# EAGLE board 3PDT (EAGLE 7.6.0)
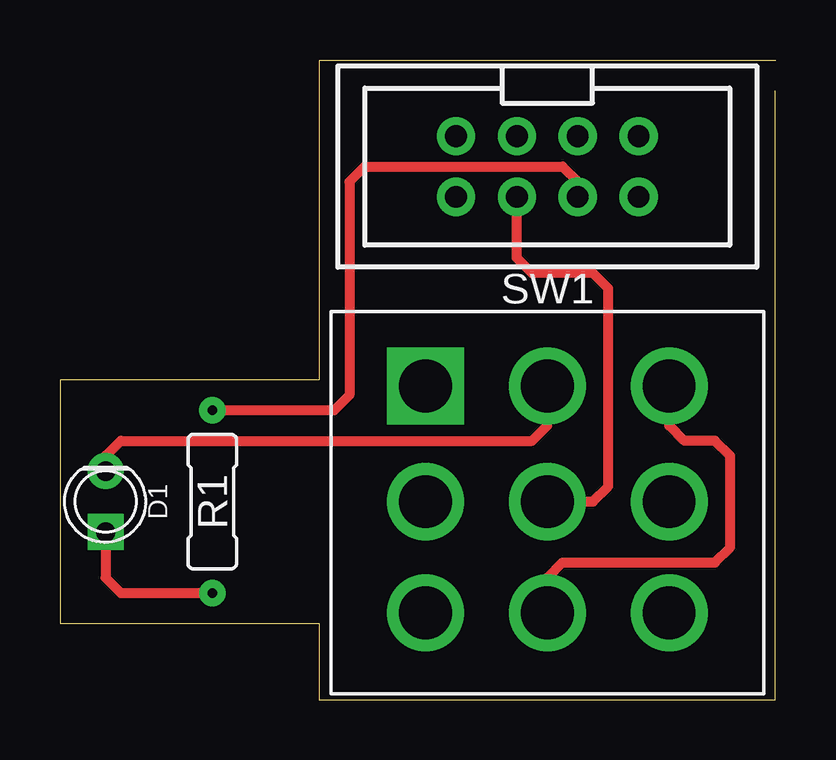
[diagram p0: board, top side]
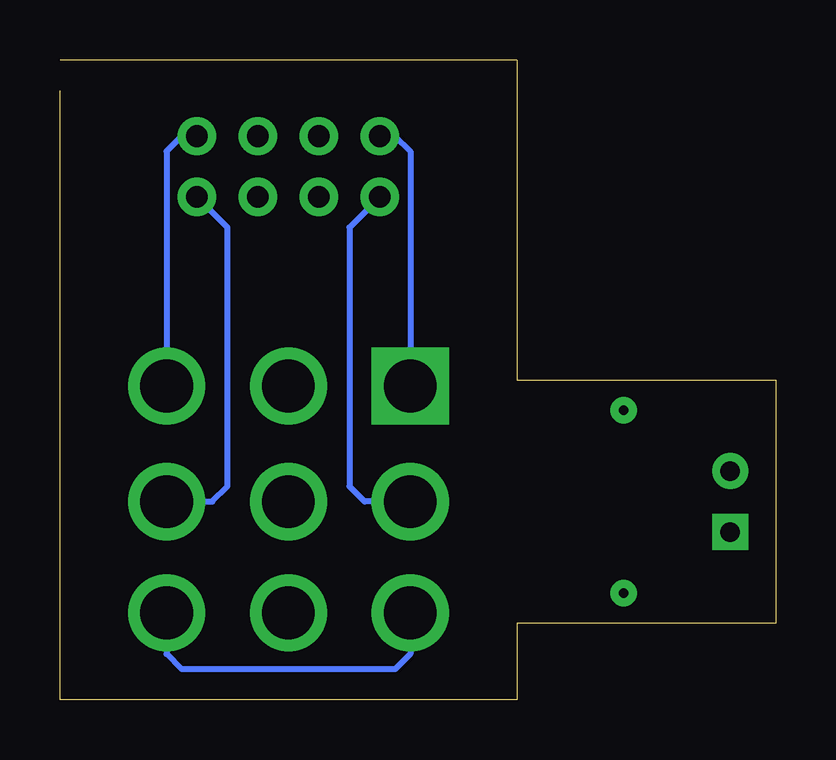
[diagram p1: board, bottom side, seen from below]

Size 29.84 x 26.67 mm. Coordinates in mm from the lower left corner, seen from the top.
Outline: 29.82,25.39 29.82,0 10.79,0 10.79,3.17 0,3.17 0,13.34 10.79,13.34 10.79,26.67 29.84,26.67
Copper layers (1*16): Top 0.035mm / dielectric 1.6mm / Bottom 0.035mm
Design rules "Elecrow_2-layer_PCB_eagle_rule": minimum track width 6mil, minimum drill 12mil, track to track 6mil, track to pad 6mil, pad to pad 6mil, via to via 8mil, smd to smd 0mil, copper to edge 20mil, drill to drill 10mil, minimum pad ring 6mil, minimum via ring 6mil, stop-mask expansion 0mil, vias tented up to drill 100mil, thermal gap 10mil

## Footprints (pad centres in the part's own frame; a part is rotated, then mirrored left to right if it is on the bottom)
3MM_D = drill 0.8 pad 1.5 square: ANODE -1.27,0 | drill 0.8 pad 1.5: P$1 1.27,0
R0207/3 = drill 0.4 pad 1.1: 1 -3.81,0; 2 3.81,0
3PDT = drill 2.2 pad 2.9 square: A1 -5.08,4.826 | drill 2.2 pad 2.9: A2 -5.08,0; A3 -5.08,-4.636; B1 0,4.826; B2 0,0; B3 0,-4.636; C1 5.08,4.826; C2 5.08,0; C3 5.08,-4.636
PAK100/2500-10 = drill 0.9 pad 1.6: 1 -3.81,-1.27; 2 -3.81,1.27; 3 -1.27,-1.27; 4 -1.27,1.27; 5 1.27,-1.27; 6 1.27,1.27; 7 3.81,-1.27; 8 3.81,1.27

## Placement (x,y rotation side)
D1  LED  [3MM_D]  1.91,8.26 90 top
R1  [R0207/3]  6.35,8.26 270 top
SW1  3PDT  [3PDT]  20.32,8.26 0 top
X1  2510-  [PAK100/2500-10]  20.32,22.23 180 top

## Library data of the parts
D1 = pedals-diodes
R1 = pedals-resistors
SW1 = pedals-switches
X1 = pedals-headers; MF: 3M; MPN: 2510-6002UB; OC_FARNELL: 9838244; OC_NEWARK: 46F4725

## Nets
N$1: SW1.A3 SW1.C3
N$2: SW1.C2 X1.2
N$3: SW1.B3 SW1.C1 X1.1
N$4: SW1.A2 X1.8
N$5: SW1.A1 X1.7
N$6: SW1.B2 X1.6
N$7: R1.1 X1.4
N$8: D1.ANODE R1.2
N$9: D1.P$1 SW1.B1

## Tracks (layer width: path | path; a pad name or v marks a point on that pad's centre or on a via)
N$1
  Bottom 0.254: SW1.A3 15.24,1.91 15.88,1.27 24.77,1.27 25.4,1.91 SW1.C3
N$2
  Bottom 0.254: X1.2 22.86,19.68 22.86,8.89 23.5,8.26 SW1.C2
N$3
  Top 0.406: SW1.B3 20.32,5.08 20.95,5.71 27.3,5.71 27.94,6.35 27.94,10.16 27.3,10.79 26.04,10.79 25.4,11.43 SW1.C1
  Bottom 0.254: X1.1 24.77,23.5 25.4,22.86 SW1.C1
N$4
  Bottom 0.254: X1.8 17.78,19.68 17.78,8.89 17.14,8.26 SW1.A2
N$5
  Bottom 0.254: X1.7 15.88,23.5 15.24,22.86 SW1.A1
N$6
  Top 0.406: X1.6 19.05,18.41 19.68,17.78 22.23,17.78 22.86,17.14 22.86,8.89 22.23,8.26 SW1.B2
N$7
  Top 0.406: R1.1 11.43,12.06 12.06,12.7 12.06,21.59 12.7,22.23 20.95,22.23 21.59,21.59 X1.4
N$8
  Top 0.406: D1.ANODE 1.91,5.08 2.54,4.45 R1.2
N$9
  Top 0.406: D1.P$1 1.91,10.16 2.54,10.79 19.68,10.79 20.32,11.43 SW1.B1